# Altium PCB hazi_kiindulas.PcbDoc
Units mm, origin at the board's own origin, x right, y up, seen from the top; angles counter-clockwise.
Board outline 92.17 x 68.73 mm, 2 copper layers (Top Layer, Bottom Layer); 38 components, 60 nets, 257 pads, 57 vias.
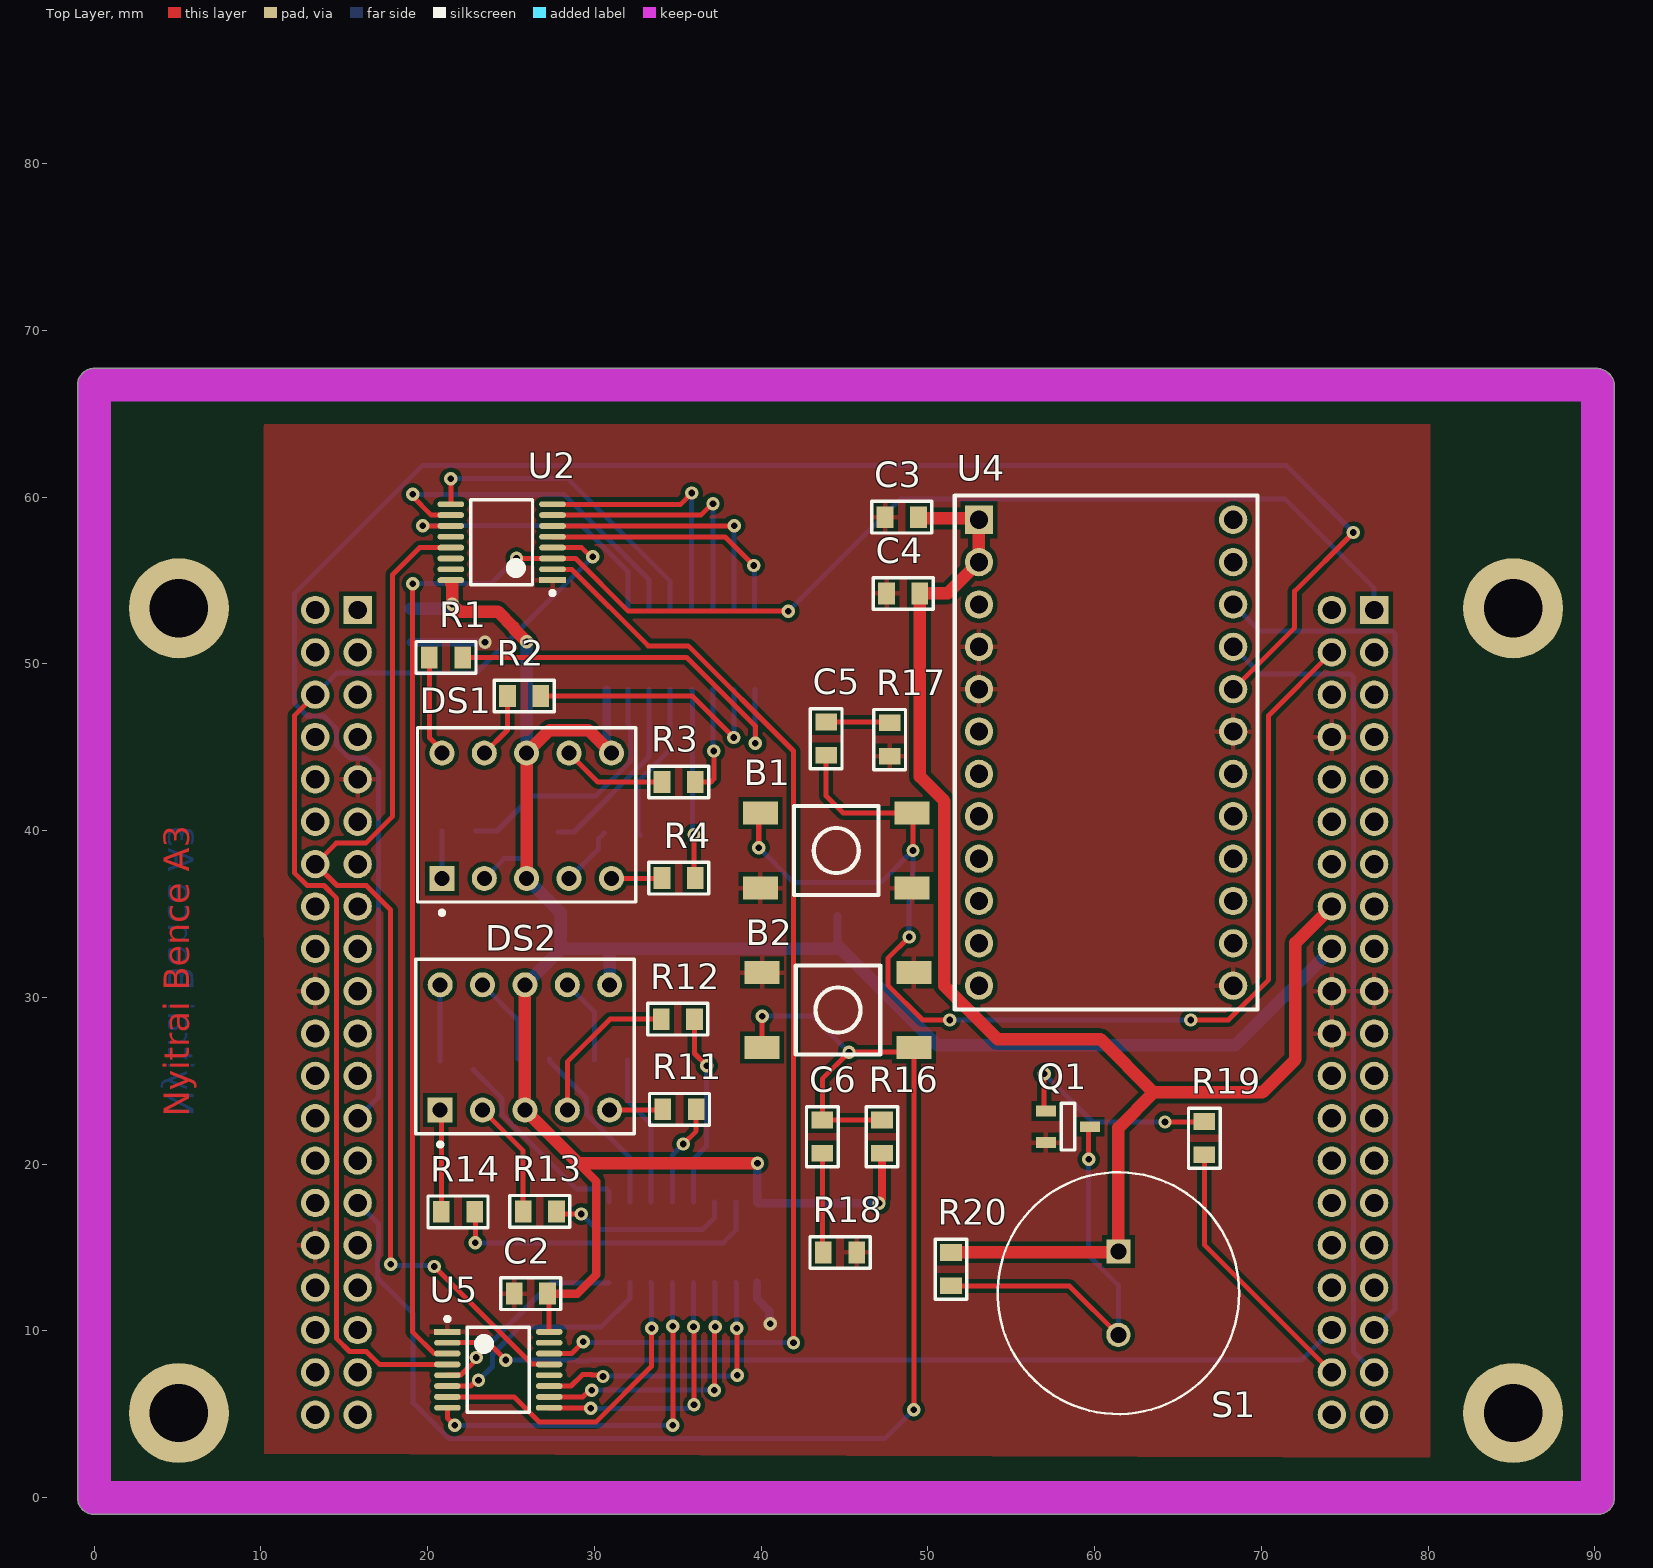
[diagram p0: Top Layer view]
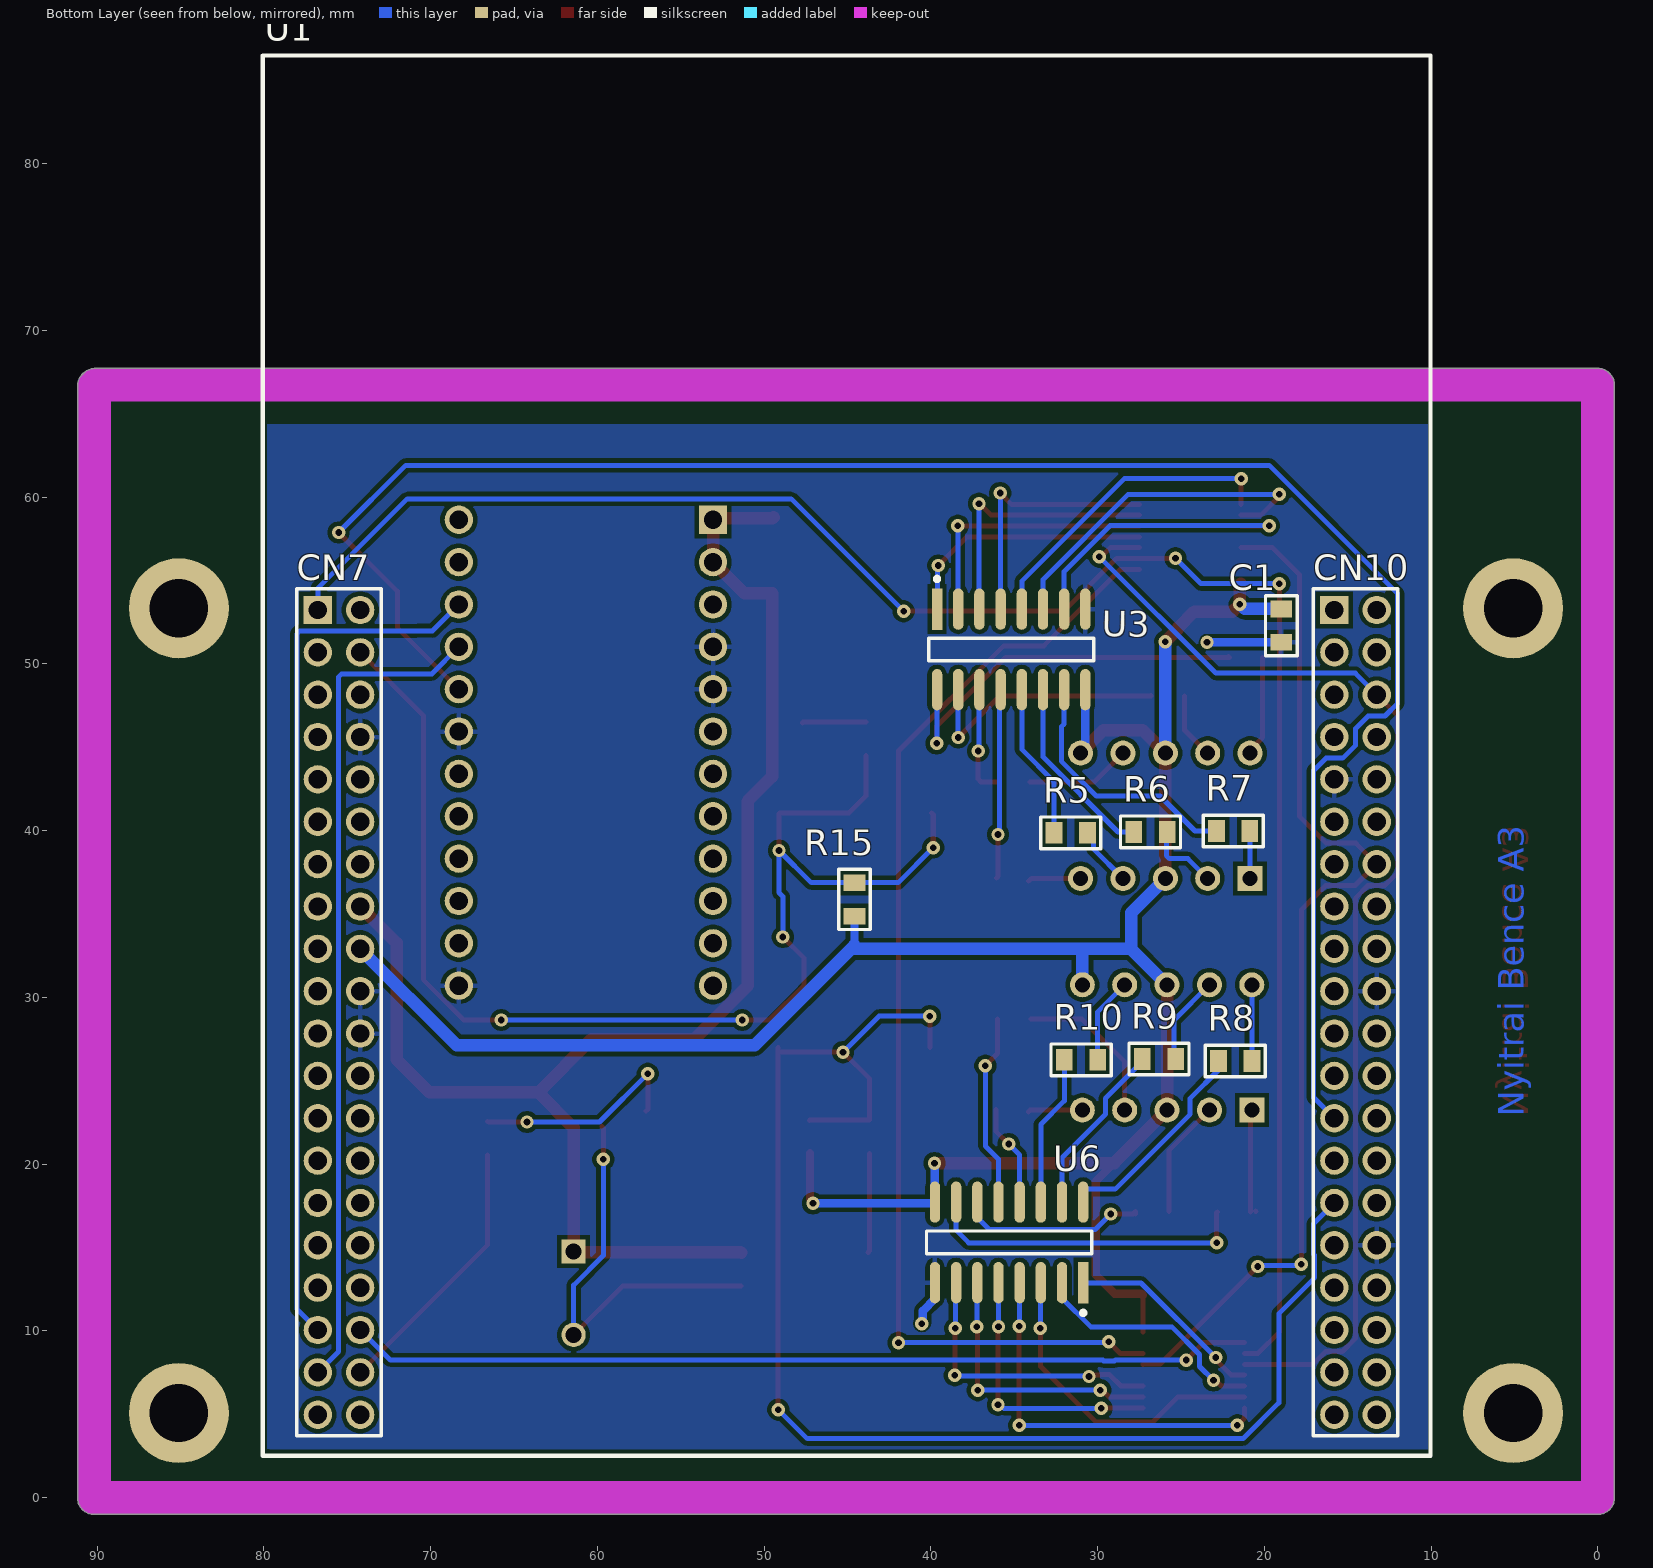
[diagram p1: Bottom Layer view, seen from below]
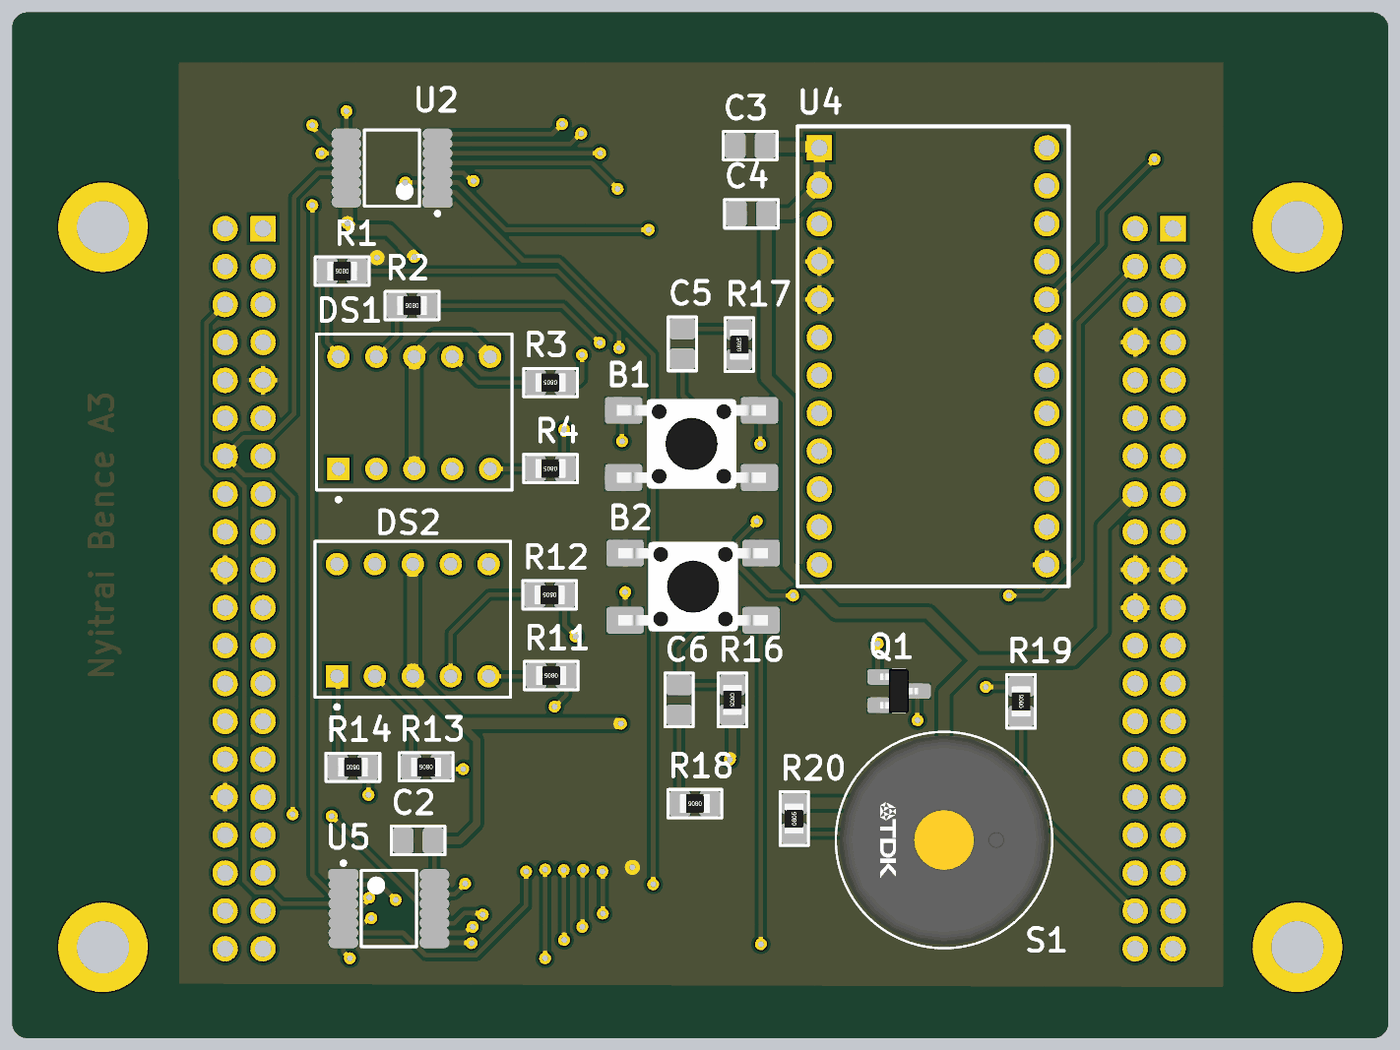
[diagram p2: 3D render of the assembled board from above, using the file's embedded part models]
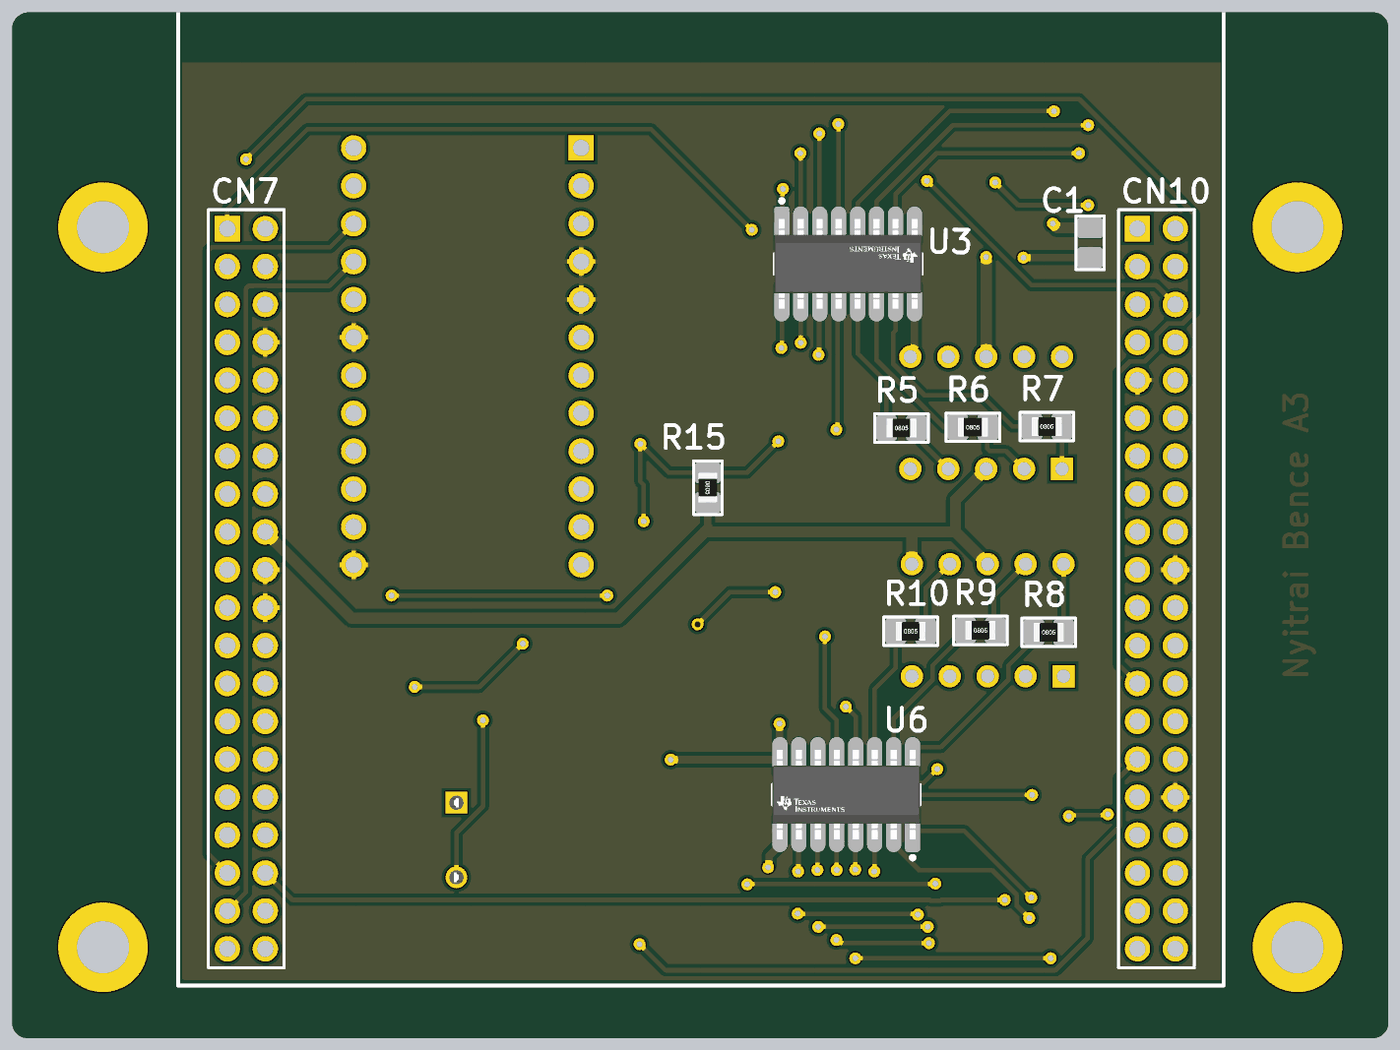
[diagram p3: 3D render of the assembled board from below, using the file's embedded part models]

## Layer stack, top to bottom
Top Solder: solder mask 0.0102, Solder Resist, Dk 3.5
Top Layer: signal copper 0.0356
Dielectric 1: dielectric 0.32, FR-4, Dk 4.8
Bottom Layer: signal copper 0.0356
Bottom Solder: solder mask 0.0102, Solder Resist, Dk 3.5

## Board outline
-1,0 -1,66.726 cw(c0,66.726) 0,67.726 90.094,67.726 cw(c90.094,66.726) 90.686,67.532 cw(c90.17,66.675) 91.17,66.675 91.17,0 cw(c90.17,0) 90.17,-1 0,-1 cw(c0,0)

## Design rules (kind name [scope] priority, off if disabled: settings)
BoardOutlineClearance [All] p1: gap=0.5 ignorepadtopadclearanceinfootprint=FALSE
Clearance Clearance_1 [All] p1: gap=0.254 ignorepadtopadclearanceinfootprint=FALSE
Clearance [All] p2: gap=0.25 ignorepadtopadclearanceinfootprint=FALSE except(0: Arc-Hole Track-Hole SMDPad-Hole THPad-Hole Via-Hole Fill-Hole Poly-Hole Region-Hole Text-Hole; 0.2: Track-THPad Track-Via THPad-THPad THPad-Via Via-Via; 0.5: Arc-Poly Track-Poly SMDPad-Poly THPad-Poly Via-Poly Fill-Poly Poly-Poly)
ComponentClearance [All] p1: gap=0.254 collisioncheckmode=3 verticalgap=0.2 showdistances=FALSE donotcheckwithout3dbody=TRUE
DiffPairsRouting [All] p1: maxlimit=0.25 minlimit=0.25 mostfreqgap=0.25 toplayer_minwidth=0.3 toplayer_maxwidth=0.38 toplayer_prefwidth=0.38 bottomlayer_minwidth=0.3 bottomlayer_maxwidth=0.38 bottomlayer_prefwidth=0.38 maxuncoupledlength=12.7
HoleSize [All] p1: absolutevalues=TRUE maxlimit=5 minlimit=0.4 maxpercent=80.000 minpercent=20.000
HoleToHoleClearance [All] p1: gap=0.25 allowstackedmicrovias=TRUE
MinimumAnnularRing [All] p1: minimumring=0.2
MinimumSolderMaskSliver [All] p1: minsoldermaskwidth=0.05
PasteMaskExpansion [All] p1: expansion=0.2
PlaneClearance [All] p1: clearance=0.5
PlaneConnect [All] p1: pad.planeconnectstyle=Relief pad.reliefexpansion=0.5 pad.reliefentries=4 pad.reliefconductorwidth=0.3 pad.reliefairgap=0.25 via.planeconnectstyle=Direct via.reliefexpansion=0.508 via.reliefentries=4 via.reliefconductorwidth=0.254 via.reliefairgap=0.254
PolygonConnect [All] p1: thpad.connectstyle=Relief thpad.reliefconductorwidth=0.3 thpad.reliefentries=4 thpad.polygonreliefangle="90 Angle" thpad.airgapwidth=0.25 smdpad.connectstyle=Relief smdpad.reliefconductorwidth=0.3 smdpad.reliefentries=4 smdpad.polygonreliefangle="90 Angle" smdpad.airgapwidth=0.25 via.connectstyle=Direct via.reliefconductorwidth=0.254 via.reliefentries=4 via.polygonreliefangle="90 Angle" via.airgapwidth=0.254
RoutingVias [All] p1: holewidth=0.4 width=0.8 viastyle="Through Hole" minholewidth=0.4 minwidth=0.75 maxholewidth=0.9 maxwidth=1.4
SilkToSilkClearance [All] p1: silktosilkclearance=0.1
SilkToSolderMaskClearance [IsPad] p1: minsilkscreentomaskgap=0.1 clearancetoexposedcopper=TRUE
SolderMaskExpansion [All] p1: expansion=0.1 istentingtop=FALSE
Width [All] p1: maxlimit=2.5 minlimit=0.2 preferedwidth=0.25
20 further rules are at their usual default settings.

## Classes and differential pairs
component class Nucleo_Pb_Buzzer: B1 B2 C5 C6 Q1 R15 R16 R17 R18 R19 R20 S1 U1
component class Accelo_7seg: C1 C2 C3 C4 DS1 DS2 R1 R2 R3 R4 R5 R6 R7 R8 R9 R10 R11 R12 R13 R14 U2 U3 U4 U5 U6

## Components (designator, comment, footprint, x,y, rotation, side; value= is the part's Value field where it differs from the comment)
B1 "Button" FP_BTN_SMD 44.501,38.811 r270 top
B2 "Button" FP_BTN_SMD 44.606,29.246 r90 top
C1 "100nF" FP_0805_CAP_085 18.974,52.299 r90 bottom
C2 "100nF" FP_0805_CAP_085 26.187,12.243 r0 top
C3 "100nF" FP_0805_CAP_085 48.428,58.801 r0 top
C4 "100nF" FP_0805_CAP_085 48.514,54.229 r0 top
C5 "100nF" FP_0805_CAP_085 43.891,45.517 r270 top
C6 "100nF" FP_0805_CAP_085 43.663,21.657 r90 top
DS1 "FYS-3911BUHR-21" FP_7SEG 25.928,40.888 r90 top
DS2 "FYS-3911BUHR-21" FP_7SEG 25.827,26.994 r90 top
Q1 "BC817" FP_SOT23-3 58.395,22.25 r180 top
R1 "100" FP_0805_RES 21.098,50.394 r180 top
R2 "100" FP_0805_RES 25.781,48.082 r180 top
R3 "100" FP_0805_RES 35.052,42.926 r180 top
R4 "100" FP_0805_RES 35.052,37.16 r180 top
R5 "100" FP_0805_RES 31.607,39.878 r180 bottom
R6 "100" FP_0805_RES 26.822,39.929 r180 bottom
R7 "100" FP_0805_RES 21.863,39.98 r180 bottom
R8 "100" FP_0805_RES 21.742,26.187 r180 bottom
R9 "100" FP_0805_RES 26.314,26.314 r180 bottom
R10 "100" FP_0805_RES 30.988,26.264 r180 bottom
R11 "100" FP_0805_RES 35.103,23.292 r180 top
R12 "100" FP_0805_RES 35.001,28.702 r180 top
R13 "100" FP_0805_RES 26.721,17.17 r180 top
R14 "100" FP_0805_RES 21.819,17.145 r180 top
R15 "4.7K" FP_0805_RES 44.577,35.881 r270 bottom
R16 "4.7K" FP_0805_RES 47.244,21.657 r270 top
R17 "100" FP_0805_RES 47.701,45.466 r90 top
R18 "100" FP_0805_RES 44.729,14.707 r180 top
R19 "330K" FP_0805_RES 66.573,21.565 r90 top
R20 "1K" FP_0805_RES 51.381,13.703 r90 top
S1 "PS1440P02BT" FP-PS1440P02BT-MFG 61.417,12.268 r270 top
U1 "NUCLEO-F446RE" FP_NUCLEO-64_2x20 76.759,53.238 r180 bottom locked
U2 "STP08CP05TTR" TSOP65P640X120-16M 24.435,57.302 r180 top
U3 "ULN2003ADRG3" FP-D0016A-IPC_A 35.179,50.873 r270 top
U4 "MKI178V2" FP_DIL24 53.061,58.649 r180 top
U5 "STP08CP05TTR" TSOP65P640X120-16M 24.232,7.671 r0 top
U6 "ULN2003ADRG3" FP-D0016A-IPC_A 35.306,15.313 r90 top

## Footprints (in the part's own frame and the unit in brackets; to place one, negate y for a bottom-side part, rotate by r counter-clockwise, add the part's x,y. Pads: shape width x height; smd on the part's side, far side on the other; paste and mask are expansions set on the pad)
FP-D0016A-IPC_A [mm]
  rect 2.474x0.622 smd far side paste+0.2 mask+0.1: 1(-2.416,4.445)
  rrect100% 2.474x0.622 smd far side paste+0.2 mask+0.1: 2(-2.416,3.175) 3(-2.416,1.905) 4(-2.416,0.635) 5(-2.416,-0.635) 6(-2.416,-1.905) 7(-2.416,-3.175) 8(-2.416,-4.445) 9(2.416,-4.445) 10(2.416,-3.175) 11(2.416,-1.905) 12(2.416,-0.635) 13(2.416,0.635) 14(2.416,1.905) 15(2.416,3.175) 16(2.416,4.445)
  body extent -3,-4.95 3,4.95, height 1.75
FP-PS1440P02BT-MFG [mm]
  rect 1.45x1.45 hole 0.95 paste+0.2 mask+0.1: 1(-2.5,0)
  round 1.45 hole 0.95 paste+0.2 mask+0.1: 2(2.5,0)
  silkscreen extent -7.25,-7.25 7.25,7.25, body extent -7.35,-7.35 7.35,7.35, height 0.25
FP_7SEG [mm] "LED, 7-Segment Display, 7.62 mm, RHD; 10 Leads; Row Space 5.08 mm; Pitch 2.54 mm"
  rect 1.5x1.5 hole 0.9: 1(-3.75,5.075)
  round 1.5 hole 0.9: 2(-3.75,2.535) 3(-3.75,-0.005) 4(-3.75,-2.545) 5(-3.75,-5.085) 6(3.765,-5.085) 7(3.765,-2.545) 8(3.765,-0.005) 9(3.765,2.535) 10(3.765,5.075)
  silkscreen extent -5.93,-6.56 5.29,6.54, body extent -5.16,-6.56 5.29,6.54, height 6.34
FP_0805_CAP_085 [mm] "0805 kapacitás YAGEO 0.85mm magas"
  rect 1x1.3 smd: 1(-1,0) 2(1,0)
  silkscreen extent -1.8,-0.95 1.8,0.95, body extent -1,-0.64 1.03,0.64, height 0.85
FP_0805_RES [mm] "0805 ellenállás"
  rect 1x1.3 smd: 1(-1,0) 2(1,0)
  silkscreen extent -1.8,-0.95 1.8,0.95, body extent -1,-0.62 1,0.63, height 0.62
FP_BTN_SMD [mm] "SMD Push Button 6x6mm"
  rect 1.4x2.1 smd: 1(2.25,4.55) 2(2.25,-4.55) 3(-2.25,4.55) 4(-2.25,-4.55)
  silkscreen extent -2.67,-2.54 2.67,2.54, body extent -3,-5 3,5, height 5.1
FP_DIL24 [mm] "DIL24"
  rect 1.7x1.7 hole 1.1: 1(0,0)
  round 1.7 hole 1.1: 2(0,2.54) 3(0,5.08) 4(0,7.62) 5(0,10.16) 6(0,12.7) 7(0,15.24) 8(0,17.78) 9(0,20.32) 10(0,22.86) 11(0,25.4) 12(0,27.94) 13(-15.24,27.94) 14(-15.24,25.4) 15(-15.24,22.86) 16(-15.24,20.32) 17(-15.24,17.78) 18(-15.24,15.24) 19(-15.24,12.7) 20(-15.24,10.16) 21(-15.24,7.62) 22(-15.24,5.08) 23(-15.24,2.54) 24(-15.24,0)
  silkscreen extent -16.7,-1.45 1.45,29.37, body extent -16.52,-1.28 1.28,29.21, height 4.86
FP_NUCLEO-64_2x20 [mm]
  round 1.7 hole 1.1: 0(0,-48.26) 0(2.54,-48.26) 0(60.96,-48.26) 0(63.5,-48.26) 2(2.54,0) 3(0,-2.54) 4(2.54,-2.54) 5(0,-5.08) 6(2.54,-5.08) 7(0,-7.62) 8(2.54,-7.62) 9(0,-10.16) 10(2.54,-10.16) 11(0,-12.7) 12(2.54,-12.7) 13(0,-15.24) 14(2.54,-15.24) 15(0,-17.78) 16(2.54,-17.78) 17(0,-20.32) 18(2.54,-20.32) 19(0,-22.86) 20(2.54,-22.86) 21(0,-25.4) 22(2.54,-25.4) 23(0,-27.94) 24(2.54,-27.94) 25(0,-30.48) 26(2.54,-30.48) 27(0,-33.02) 28(2.54,-33.02) 29(0,-35.56) 30(2.54,-35.56) 31(0,-38.1) 32(2.54,-38.1) 33(0,-40.64) 34(2.54,-40.64) 35(0,-43.18) 36(2.54,-43.18) 37(0,-45.72) 38(2.54,-45.72) 40(63.5,0) 41(60.96,-2.54) 42(63.5,-2.54) 43(60.96,-5.08) 44(63.5,-5.08) 45(60.96,-7.62) 46(63.5,-7.62) 47(60.96,-10.16) 48(63.5,-10.16) 49(60.96,-12.7) 50(63.5,-12.7) 51(60.96,-15.24) 52(63.5,-15.24) 53(60.96,-17.78) 54(63.5,-17.78) 55(60.96,-20.32) 56(63.5,-20.32) 57(60.96,-22.86) 58(63.5,-22.86) 59(60.96,-25.4) 60(63.5,-25.4) 61(60.96,-27.94) 62(63.5,-27.94) 63(60.96,-30.48) 64(63.5,-30.48) 65(60.96,-33.02) 66(63.5,-33.02) 67(60.96,-35.56) 68(63.5,-35.56) 69(60.96,-38.1) 70(63.5,-38.1) 71(60.96,-40.64) 72(63.5,-40.64) 73(60.96,-43.18) 74(63.5,-43.18) 75(60.96,-45.72) 76(63.5,-45.72)
  rect 1.7x1.7 hole 1.1: 1(0,0) 39(60.96,0)
  silkscreen extent -3.3,-50.73 66.72,33.25, body extent -3.3,-50.72 66.72,33.25, height 11
FP_SOT23-3 [mm] "SOT23-3 tok"
  rect 1.2x0.65 smd: 1(1.327,-0.95) 2(1.327,0.95) 3(-1.327,0)
  silkscreen extent -0.4,-1.4 0.4,1.4, body extent -1.27,-1.46 1.27,1.46, height 0.97
TSOP65P640X120-16M [mm] "TSOP, 16-Leads, Body 5,00x4,40mm, Pitch 0,65mm, IPC Low Density"
  rect 1.6x0.35 smd: 1(-3.05,2.275)
  oval 1.6x0.35 smd: 2(-3.05,1.625) 3(-3.05,0.975) 4(-3.05,0.325) 5(-3.05,-0.325) 6(-3.05,-0.975) 7(-3.05,-1.625) 8(-3.05,-2.275) 9(3.05,-2.275) 10(3.05,-1.625) 11(3.05,-0.975) 12(3.05,-0.325) 13(3.05,0.325) 14(3.05,0.975) 15(3.05,1.625) 16(3.05,2.275)
  silkscreen extent -3.18,-2.55 1.85,3.17, body extent -2.25,-2.55 2.25,2.55, height 1.2

## Part data
B1 B2: library part "Button 4P", "Push button", Name="TACT 6x 6 4P SPST 2 FSM4JSMA 4-1437565-1 (TYC) 50mA 12VDC SMD H=5mm 160g BLACK HEAD", Reference=45-05-43, Supplier=Lomex
C1 C2 C3 C4 C5 C6: library part CAP, "Capacitor", Name="100nF 0805 10% 50V X7R 0805B104K500CT (WAL)", Reference=82-10-76, Supplier=Lomex
DS1 DS2: library part "7SEG Red-CA", "7-Segment Display", ComponentLink1Description="Manufacturer Link", ComponentLink1URL=http://www.agilent.com/, Name=FYS-3911BUHR-21, Reference=35-03-94, Supplier=Lomex
Q1: "NPN General-purpose Transistor", ComponentLink1Description="Manufacturer Link", ComponentLink1URL=http://www.semiconductors.philips.com/, ComponentLink2Description=Datasheet, ComponentLink2URL=http://www.semiconductors.philips.com/acrobat/datasheets/BC817_BC817W_BC337_5.pdf, Name=BC817-40, Reference=506308, Supplier=Farnell
R1 R2 R3 R4 R5 R6 R7 R8 R9 R10 R11 R12 R13 R14 R15 R16 R17 R18 R19 R20: library part RES, "Resistor", Power="125 mW", Supplier=Lomex
  R1 R2 R3 R4 R5 R6 R7 R8 R9 R10 R11 R12 R13 R14 R17 R18: Name="100R 0805 5% RC0805JR-10100RL 0.125W (YAG)", Reference=[81-34-71
  R15 R16: Name="4K70 0805 5% RS-05K472JT 0.125W (FNG)", Reference=81-35-61
  R19: Name="330K 0805 5% CR-05JL7--330K 0.125W (VIK)", Reference=81-11-16
  R20: Name="1K00 0805 5% CR-05JL7----1K 0.125W (VIK)", Reference=81-10-87
S1: "AUDIO PIEZO TRANSDUCER 30V TH", Name=PS1440P02BT, Reference=3212600, Supplier=Farnell
U2 U5: "Low voltage, low current power 8-bit shift register", Name=STP08CP05TTR, Supplier="ST tanszeki forras"
U3 U6: library part CMP-04912-000074-1, "TRANS 7NPN DARL 50V 0.5A 16SOIC", Name=ULN2003ADRG3, Reference=3009693, Supplier=Farnell
U4: library part MKI160V1, "LSM6DS3 inertial module adapter", Name=MKI178V2, Supplier="ST tanszeki forras"
U1: Name="Nucleo F446RE", Reference=NUCLEO, Supplier=Tanszék

## Free pads (board coordinates)
  round 6 hole 3.5: ""(5.08,5.08) ""(5.08,53.34) ""(85.09,5.08) ""(85.09,53.34)

## Via types
v1: diameter 0.8, hole 0.4, Top Layer to Bottom Layer, 57 vias

## Nets (pads, with @x,y where several pads share a name; then routed paths per layer and width w, separated by ;. In a path a pad name is that pad's centre, name@x,y a point inside that pad or via, vN(x,y) a via of type N, cw(c..) or ccw(c..) an arc to the next point about the centre after c; other vN are vias at no path point)
3V3: C3.2 C4.2 R20.2 S1.1 U1.16 U4.1 U4.2 | length 89.8
  Top Layer w0.75: C3.2 49.505,58.725 52.984,58.725 U4.1 U4.2 51.181,54.229 C4.2 49.514,43.238 50.981,41.771 50.981,30.697 54.175,27.502 60.345,27.502 63.539,24.308 ; R20.2@51.359,14.681 R20.2 51.402,14.725 61.374,14.725 S1.1 61.417,22.186 63.539,24.308 ; U1.16 72.039,33.279 72.039,26.294 70.053,24.308 63.539,24.308
5V: C1.2 C2.2 DS1.3 DS1.6 DS1.8 DS2.3 DS2.6 DS2.8 R15.2 R16.2 U1.18 U2.16 U3.9 U5.16 U6.9 | length 145.2
  Top Layer w0.3: U5.16 C2.2@27.282,12.149
  Top Layer w0.5: C2.2@27.282,12.149 27.376,12.243 28.981,12.243 30.114,13.375 30.114,18.962 29.01,20.066 ; v1(47.066,17.653) 47.066,17.734 47.244,17.912 R16.2
  Top Layer w0.75: 21.412,54.813 21.463,54.762 v1(21.463,53.576) 21.902,53.137 24.206,53.137 25.155,52.188 25.155,52.131 25.933,51.353 v1(25.933,51.339) ; DS2.8 DS2.3 29.01,20.066 v1(39.776,20.066) ; DS1.3@25.857,37.062 DS1.3 DS1.8 27.312,46.032 29.634,46.032 DS1.6
  Bottom Layer w0.5: U3.9 30.734,45.203 31.013,44.924 DS1.6 ; v1(39.776,20.066) 39.764,20.053 39.764,17.742 U6.9 39.751,17.709 39.807,17.653 v1(47.066,17.653) ; 44.577,33.122 R15.2
  Bottom Layer w0.75: C1.2 21.172,53.299 21.449,53.576 v1(21.463,53.576) ; DS2.8 27.991,32.918 ; DS1.3 27.991,35.081 27.991,32.918 ; DS1.8 v1(25.933,51.339) ; DS2.6 30.912,32.918 ; 44.577,32.918 30.912,32.918 ; 44.577,33.122 50.571,27.127 68.428,27.127 U1.18 ; 27.991,32.918 30.912,32.918
Buzzer_cntrl: R19.1 U1.38 | length 16.2
  Top Layer w0.3: R19.1 66.573,15.164 U1.38
GND: B1.1 B1.2 B2.1 B2.2 C1.1 C2.1 C3.1 C4.1 Q1.2 R17.1 R18.1 U1.8 U1.19 U1.20 U1.22 U1.47 U1.58 U1.70 U2.1 U3.8 U4.4 U4.5 U4.13 U4.19 U5.1 U6.8 | length 7.2
  Bottom Layer w0.5: C1.1 v1(23.435,51.299) ; U6.8 39.751,11.938 40.481,11.208 40.481,10.497 v1(40.538,10.439)
NetB1_3: B1.3 B1.4 C5.2 R15.1 U1.4 | length 78.1
  Top Layer w0.3: v1(39.853,38.989) 39.853,40.963 B1.4 ; C5.2 43.891,42.088 44.918,41.061 B1.3 49.098,41.014 v1(49.098,38.811) v1@48.979,38.811 ; v1@48.87,33.522 v1(48.87,33.63) 47.597,32.357 47.597,30.734 49.679,28.651 v1(51.308,28.651) ; v1(65.761,28.651) 68.017,28.651 70.434,31.069 70.434,46.914 U1.4
  Bottom Layer w0.3: v1(39.853,38.989) 41.961,36.881 R15.1 47.168,36.881 v1(49.098,38.811) 49.098,36.287 48.87,36.058 v1(48.87,33.63) ; v1(51.308,28.651) v1(65.761,28.651)
NetB2_3: B2.3 B2.4 C6.2 R16.1 U1.67 | length 87
  Top Layer w0.3: B2.3 v1(40.056,28.88) ; R16.1@47.269,22.631 R16.1 C6.2 43.663,25.121 v1(45.263,26.721) B2.4@49.149,26.721 ; v1(49.149,5.283) B2.4@49.149,26.721 ; B2.4 49.149,26.989 B2.4@49.149,26.721
  Bottom Layer w0.3: U1.67 17.053,16.424 17.053,14.619 16.976,14.542 16.976,13.195 19.129,11.041 19.129,5.693 21.282,3.539 47.405,3.539 v1(49.149,5.283) ; v1(40.056,28.88) 43.104,28.88 v1(45.263,26.721)
NetC5_1: C5.1 R17.2 | length 3.8
  Top Layer w0.3: C5.1 47.65,46.517 R17.2
NetC6_1: C6.1 R18.2 | length 6
  Top Layer w0.3: C6.1 43.663,14.808 R18.2@43.764,14.707
NetDS1_1: DS1.1 R7.2 | length 3.1
  Top Layer w0.3: DS1.1 DS1.1@21.006,36.986
  Bottom Layer w0.3: DS1.1 20.853,39.97 R7.2
NetDS1_2: DS1.2 R6.2 | length 4.7
  Top Layer w0.3: DS1.2@23.368,37.109 23.368,37.113 DS1.2
  Bottom Layer w0.3: DS1.2@23.393,37.299 DS1.2 23.474,37.219 24.584,38.329 25.697,38.329 25.873,38.504 R6.2@25.873,39.929
NetDS1_4: DS1.4 R5.2 | length 3.6
  Bottom Layer w0.3: DS1.4 30.257,38.922 30.257,39.528 R5.2
NetDS1_5: DS1.5 R4.2 | length 3.2
  Top Layer w0.3: DS1.5 33.972,37.138 R4.2@34.128,36.982
NetDS1_7: DS1.7 R3.2 | length 6.3
  Top Layer w0.3: DS1.7 30.201,42.926 R3.2
NetDS1_9: DS1.9 R2.2 | length 4
  Top Layer w0.3: DS1.9 24.781,46.041 R2.2
NetDS1_10: DS1.10 R1.2 | length 6.1
  Top Layer w0.3: R1.2 20.098,45.595 20.853,44.839 DS1.10
NetDS2_1: DS2.1 R14.2 | length 6.2
  Top Layer w0.3: R14.2@20.498,17.17 20.514,17.186 R14.2@20.514,17.196 ; DS2.1 20.819,23.178 R14.2
NetDS2_2: DS2.2 R13.2 | length 7.1
  Top Layer w0.3: DS2.2 25.721,20.815 R13.2
NetDS2_4: DS2.4 R12.2 | length 9.6
  Top Layer w0.3: DS2.4 28.372,26.137 30.937,28.702 R12.2
NetDS2_5: DS2.5 R11.2 | length 3.3
  Top Layer w0.3: DS2.5 34.049,23.244 R11.2@34.154,23.139
NetDS2_7: DS2.7 R10.2 | length 5.2
  Bottom Layer w0.3: DS2.7 29.988,29.143 R10.2
NetDS2_9: DS2.9 R9.2 | length 5.3
  Bottom Layer w0.3: DS2.9 25.416,28.635 R9.2@25.416,26.314
NetDS2_10: DS2.10 R8.2 | length 4.6
  Bottom Layer w0.3: R8.2 20.752,26.197 DS2.10
NetQ1_1: Q1.1 R19.2 | length 13.1
  Top Layer w0.3: v1(56.972,25.425) 56.972,23.296 Q1.1 ; v1(64.211,22.53) 66.539,22.53 R19.2
  Bottom Layer w0.3: v1(56.972,25.425) 59.868,22.53 v1(64.211,22.53)
NetQ1_3: Q1.3 R20.1 S1.2 | length 24.5
  Top Layer w0.3: R20.1 58.482,12.703 S1.2 ; v1(59.639,20.295) 59.639,22.168 Q1.3
  Bottom Layer w0.3: v1(59.639,20.295) 59.639,14.525 61.417,12.747 S1.2
NetR1_1: R1.1 U3.16 | length 23.6
  Top Layer w0.3: R1.1@22.149,50.444 R1.1 35.535,50.394 39.649,46.279 v1(39.649,45.237)
  Bottom Layer w0.3: U3.16 39.624,45.263 v1(39.649,45.237)
NetR2_1: R2.1 U3.15 | length 15.5
  Top Layer w0.3: R2.1@26.806,48.108 R2.1 35.865,48.082 v1(38.354,45.593)
  Bottom Layer w0.3: v1(38.354,45.593) U3.15 U3.15@38.379,48.432
NetR3_1: R3.1 U3.14 | length 6.6
  Top Layer w0.3: R3.1 36.984,42.926 37.16,43.102 v1(37.16,44.78)
  Bottom Layer w0.3: U3.14 37.122,48.419 37.122,44.818 v1(37.16,44.78)
NetR4_1: R4.1 U3.13 | length 11.4
  Top Layer w0.3: v1(35.966,39.776) 35.966,37.246 R4.1
  Bottom Layer w0.3: U3.13 35.876,48.395 35.876,39.867 v1(35.966,39.776)
NetR5_1: R5.1 U3.12 | length 9.6
  Bottom Layer w0.3: R5.1@32.759,39.726 R5.1 32.607,42.942 34.544,44.879 U3.12
NetR6_1: R6.1 U3.11 | length 11.3
  Bottom Layer w0.3: R6.1 28.772,39.929 33.274,44.43 U3.11
NetR7_1: R7.1 U3.10 | length 15.4
  Bottom Layer w0.3: R7.1 24.152,39.98 26.25,42.077 30.07,42.077 32.167,44.175 32.167,46.242 32.004,46.406 U3.10
NetR8_1: R8.1 U6.16 | length 12.4
  Bottom Layer w0.3: R8.1@22.717,25.677 24.446,23.948 24.446,22.998 28.939,18.505 30.712,18.505 30.861,18.356 U6.16
NetR9_1: R9.1 U6.15 | length 10.6
  Bottom Layer w0.3: R9.1 27.314,26.164 29.526,23.953 29.526,22.998 32.131,20.393 U6.15
NetR10_1: R10.1 U6.14 | length 9.1
  Bottom Layer w0.3: R10.1 31.988,23.8 33.401,22.387 U6.14
NetR11_1: R11.1 U6.13 | length 6.2
  Top Layer w0.3: v1(35.331,21.209) 36.103,21.98 R11.1
  Bottom Layer w0.3: U6.13 34.671,20.549 v1(35.331,21.209)
NetR12_1: R12.1 U6.12 | length 11.6
  Top Layer w0.3: R12.1 36.001,26.635 v1(36.728,25.908)
  Bottom Layer w0.3: U6.12 35.941,20.301 36.728,21.088 v1(36.728,25.908)
NetR13_1: R13.1 U6.11 | length 11.3
  Top Layer w0.3: R13.1@27.721,17.02 R13.1 27.873,17.018 v1(29.21,17.018)
  Bottom Layer w0.3: v1(29.21,17.018) 30.14,16.088 36.496,16.088 37.211,16.803 U6.11
NetR14_1: R14.1 U6.10 | length 19.5
  Top Layer w0.3: R14.1 22.86,17.104 v1(22.86,15.291)
  Bottom Layer w0.3: v1(22.86,15.291) 37.73,15.291 38.481,16.042 U6.10
NetU1_35: U1.35 U4.22 | length 52.7
  Bottom Layer w0.3: U4.22 69.881,51.988 70.781,51.988 70.838,51.984 77.837,51.984 78.013,51.809 78.013,51.684 78.013,11.312 U1.35
NetU1_36: U1.36 U5.2 | length 54.3
  Top Layer w0.3: U5.2 23.648,9.296 v1(24.689,8.255)
  Bottom Layer w0.3: v1(24.689,8.255) 28.937,8.255 28.979,8.213 29.645,8.213 29.687,8.255 72.415,8.255 U1.36
NetU1_37: U1.37 U4.21 | length 50.2
  Bottom Layer w0.3: U4.21 69.926,49.403 74.066,49.403 cw(c74.219,48.158) 74.231,49.412 75.329,49.403 75.417,49.315 75.505,49.227 75.505,8.772 U1.37
NetU1_52: U1.52 U2.13 U5.13 | length 63.4
  Top Layer w0.3: v1(17.78,13.995) 17.78,35.251 16.318,36.712 14.562,36.712 13.276,37.998 U1.52 14.513,39.252 16.286,39.252 17.897,40.863 17.897,55.362 19.512,56.977 U2.13 ; v1(20.396,13.868) 26.259,8.005 27.272,8.005 U5.13
  Bottom Layer w0.3: v1(17.78,13.995) 17.843,13.932 20.333,13.932 v1(20.396,13.868)
NetU2_2: U2.2 U5.14 | length 69.4
  Top Layer w0.3: U5.14 28.636,8.646 v1(29.337,9.347) ; U2.2 27.494,55.668 28.641,55.668 33.221,51.088 35.624,51.088 41.935,44.776 v1(41.935,9.296)
  Bottom Layer w0.3: v1(29.337,9.347) 29.362,9.322 41.91,9.322 v1(41.935,9.296)
NetU2_5: U2.5 U3.1 | length 15.4
  Top Layer w0.3: U2.5 37.826,57.627 v1(39.548,55.905)
  Bottom Layer w0.3: v1(39.548,55.905) 39.586,55.867 39.586,53.327 U3.1
NetU2_6: U2.6 U3.2 | length 15.9
  Top Layer w0.3: U2.6 27.493,58.285 38.372,58.285 v1(38.379,58.293)
  Bottom Layer w0.3: U3.2 38.367,53.302 38.367,58.28 v1(38.379,58.293)
NetU2_7: U2.7 U3.3 | length 16.2
  Top Layer w0.3: U2.7 36.382,58.927 37.068,59.614 v1(37.109,59.614)
  Bottom Layer w0.3: U3.3 37.097,53.302 37.097,59.601 v1(37.109,59.614)
NetU2_8: U2.8 U3.4 | length 15.6
  Top Layer w0.3: U2.8 35.168,59.577 v1(35.839,60.249)
  Bottom Layer w0.3: U3.4 35.827,53.302 35.827,60.236 v1(35.839,60.249)
NetU2_9: U2.9 U3.5 | length 18.9
  Top Layer w0.3: U2.9 21.387,59.579 v1(21.387,61.112)
  Bottom Layer w0.3: v1(21.387,61.112) 28.397,61.112 34.544,54.966 U3.5
NetU2_10: U2.10 U3.6 | length 20.9
  Top Layer w0.3: v1(19.101,60.173) 19.101,60.046 20.219,58.927 U2.10
  Bottom Layer w0.3: v1(19.101,60.173) 28.159,60.173 33.274,55.057 U3.6
NetU2_11: U2.11 U3.7 | length 17.4
  Top Layer w0.3: v1(19.71,58.293) 19.718,58.285 21.377,58.285 U2.11
  Bottom Layer w0.3: v1(19.71,58.293) 29.255,58.293 32.004,55.544 U3.7
NetU5_5: U5.5 U6.1 | length 12.1
  Top Layer w0.3: U5.5 21.191,7.355 21.985,7.355 22.911,8.281 v1(22.911,8.407)
  Bottom Layer w0.3: v1(22.911,8.407) 22.921,8.407 27.391,12.878 30.842,12.878 U6.1
NetU5_6: U5.6 U6.2 | length 14.5
  Top Layer w0.3: U5.6 22.574,6.696 22.914,7.036 v1(23.05,7.036)
  Bottom Layer w0.3: v1(23.05,7.036) 23.885,7.871 23.885,8.588 25.543,10.246 30.406,10.246 32.131,11.971 U6.2
NetU5_7: U5.7 U6.3 | length 19.3
  Top Layer w0.3: U5.7 25.188,6.046 26.678,4.555 30.102,4.555 33.426,7.88 v1(33.426,10.16)
  Bottom Layer w0.3: U6.3 33.414,12.884 33.414,10.173 v1(33.426,10.16)
NetU5_8: U5.8 U6.4 | length 22.9
  Top Layer w0.3: U5.8 21.182,4.777 v1(21.615,4.343) ; v1(34.696,4.343) v1(34.696,10.287)
  Bottom Layer w0.3: v1(21.615,4.343) v1(34.696,4.343) ; U6.4 34.684,12.884 34.684,10.3 v1(34.696,10.287)
NetU5_9: U5.9 U6.5 | length 16.1
  Top Layer w0.3: U5.9 27.291,5.386 29.742,5.386 v1(29.769,5.359) ; v1(35.941,10.262) 35.966,10.236 v1(35.966,5.572)
  Bottom Layer w0.3: v1(29.769,5.359) 35.619,5.359 35.831,5.572 v1(35.966,5.572) ; v1(35.941,10.262) U6.5
NetU5_10: U5.10 U6.6 | length 16.5
  Top Layer w0.3: U5.10 29.304,6.046 29.71,6.452 v1(29.845,6.452) ; v1(37.186,6.452) 37.211,6.477 37.211,10.236 v1(37.236,10.262)
  Bottom Layer w0.3: v1(29.845,6.452) 29.854,6.46 v1@37.177,6.46 ; U6.6 37.224,12.884 37.224,10.274 v1(37.236,10.262)
NetU5_11: U5.11 U6.7 | length 17.2
  Top Layer w0.3: U5.11 28.596,6.696 29.283,7.383 29.81,7.383 29.828,7.365 30.415,7.365 v1(30.51,7.269) ; v1(38.532,10.16) 38.544,10.147 38.544,7.353 v1(38.557,7.341)
  Bottom Layer w0.3: v1(30.51,7.269) 30.543,7.302 38.519,7.302 v1(38.557,7.341) ; U6.7 38.506,12.872 38.506,10.185 v1(38.532,10.16)
SCK2: U1.63 U4.20 | length 116
  Top Layer w0.3: U4.20 71.994,52.181 71.994,54.366 v1(75.514,57.887)
  Bottom Layer w0.3: U1.63 17.053,24.012 17.053,43.598 16.302,44.348 15.295,44.348 14.521,45.123 14.521,46.13 13.766,46.884 12.759,46.884 12.005,47.639 12.005,54.214 19.708,61.916 71.484,61.916 v1(75.514,57.887)
SCK3: U1.1 U2.3 U5.3 | length 113.5
  Top Layer w0.3: v1(19.101,54.813) 19.101,9.933 20.378,8.655 21.172,8.655 U5.3 ; v1(25.324,56.337) 25.329,56.332 27.48,56.332 U2.3 28.87,56.327 32.035,53.162 v1(41.631,53.162)
  Bottom Layer w0.3: v1(19.101,54.813) 23.8,54.813 v1(25.324,56.337) ; v1@41.599,53.194 v1(41.631,53.162) 48.371,59.903 71.395,59.903 76.759,54.538 U1.1
SS_7seg: U1.44 U2.4 U5.4 | length 70.8
  Top Layer w0.3: U1.44 12.005,46.904 12.005,37.479 12.771,36.712 13.778,36.712 14.545,35.946 14.545,9.539 15.311,8.772 16.318,8.772 17.095,7.996 U5.4 ; U2.4 29.232,56.977 29.771,56.439 v1(29.896,56.439)
  Bottom Layer w0.3: U1.44 14.545,49.444 22.901,49.444 v1(29.896,56.439)
pads on no net: U1.0 U1.2 U1.3 U1.5 U1.6 U1.7 U1.9 U1.10 U1.11 U1.12 U1.13 U1.14 U1.15 U1.17 U1.21 U1.23 U1.24 U1.25 U1.26 U1.27 U1.28 U1.29 U1.30 U1.31 U1.32 U1.33 U1.34 U1.39 U1.40 U1.41 U1.42 U1.43 U1.45 U1.46 U1.48 U1.49 U1.50 U1.51 U1.53 U1.54 U1.55 U1.56 U1.57 U1.59 U1.60 U1.61 U1.62 U1.64 U1.65 U1.66 U1.68 U1.69 U1.71 U1.72 U1.73 U1.74 U1.75 U1.76 U2.12 U2.14 U2.15 U4.3 U4.6 U4.7 U4.8 U4.9 U4.10 U4.11 U4.12 U4.14 U4.15 U4.16 U4.17 U4.18 U4.23 U4.24 U5.12 U5.15

## Polygon pours and split planes (outlines as drawn)
GND on Top Layer "GND_L01_P001" (solid, remove dead copper, pour order 1): 10.16,64.414 10.211,64.364 79.781,64.364 79.781,2.769 79.654,2.896 10.211,2.896
GND on Top Layer "GND_L01_P000" (solid, remove dead copper, pour order 0): 80.112,2.412 80.112,64.389 10.185,64.389 10.185,2.642
GND on Bottom Layer "GND_L02_P002" (solid, remove dead copper, pour order 2): 10.211,64.364 79.781,64.364 79.781,2.896 79.718,2.832 79.654,2.896 10.211,2.896

## Keep-outs
Keep-Out Layer:
  lines w2: 0,0 0,66.726 22.943,66.726 67.812,66.726 90.094,66.726 90.094,66.675 90.17,66.675 90.17,0 0,0

## Other copper
Top Layer:
  text "Nyitrai Bence A3" at 5.715,22.86 h1.52 r90
Bottom Layer:
  text "Nyitrai Bence A3" at 4.445,22.86 h1.52 r270

## Silkscreen, mask and mechanical layers (free items; w line width, h text height)
Mechanical 1:
  lines w0.254: 0,0 0,66.624 16.431,66.624 27.306,66.624 28.715,66.624 31.533,66.624 37.168,66.624 39.986,66.624 59.655,66.624 74.163,66.624 90.17,66.624 90.17,0 0,0

## Text inside footprints (layer, text, board x,y; h text height)
U1: Bottom Overlay "CN10" at 17.069,55.016 h1.52; Bottom Overlay "CN7" at 78.029,55.016 h1.52